# Altium PCB nodeMCU vs motor.PcbDoc
Units mil, origin at the board's own origin, x right, y up, seen from the top; angles counter-clockwise.
Board outline 3010.03 x 2385.03 mil, 2 copper layers (Top Layer, Bottom Layer); 4 components, 12 nets, 48 pads, 4 vias.
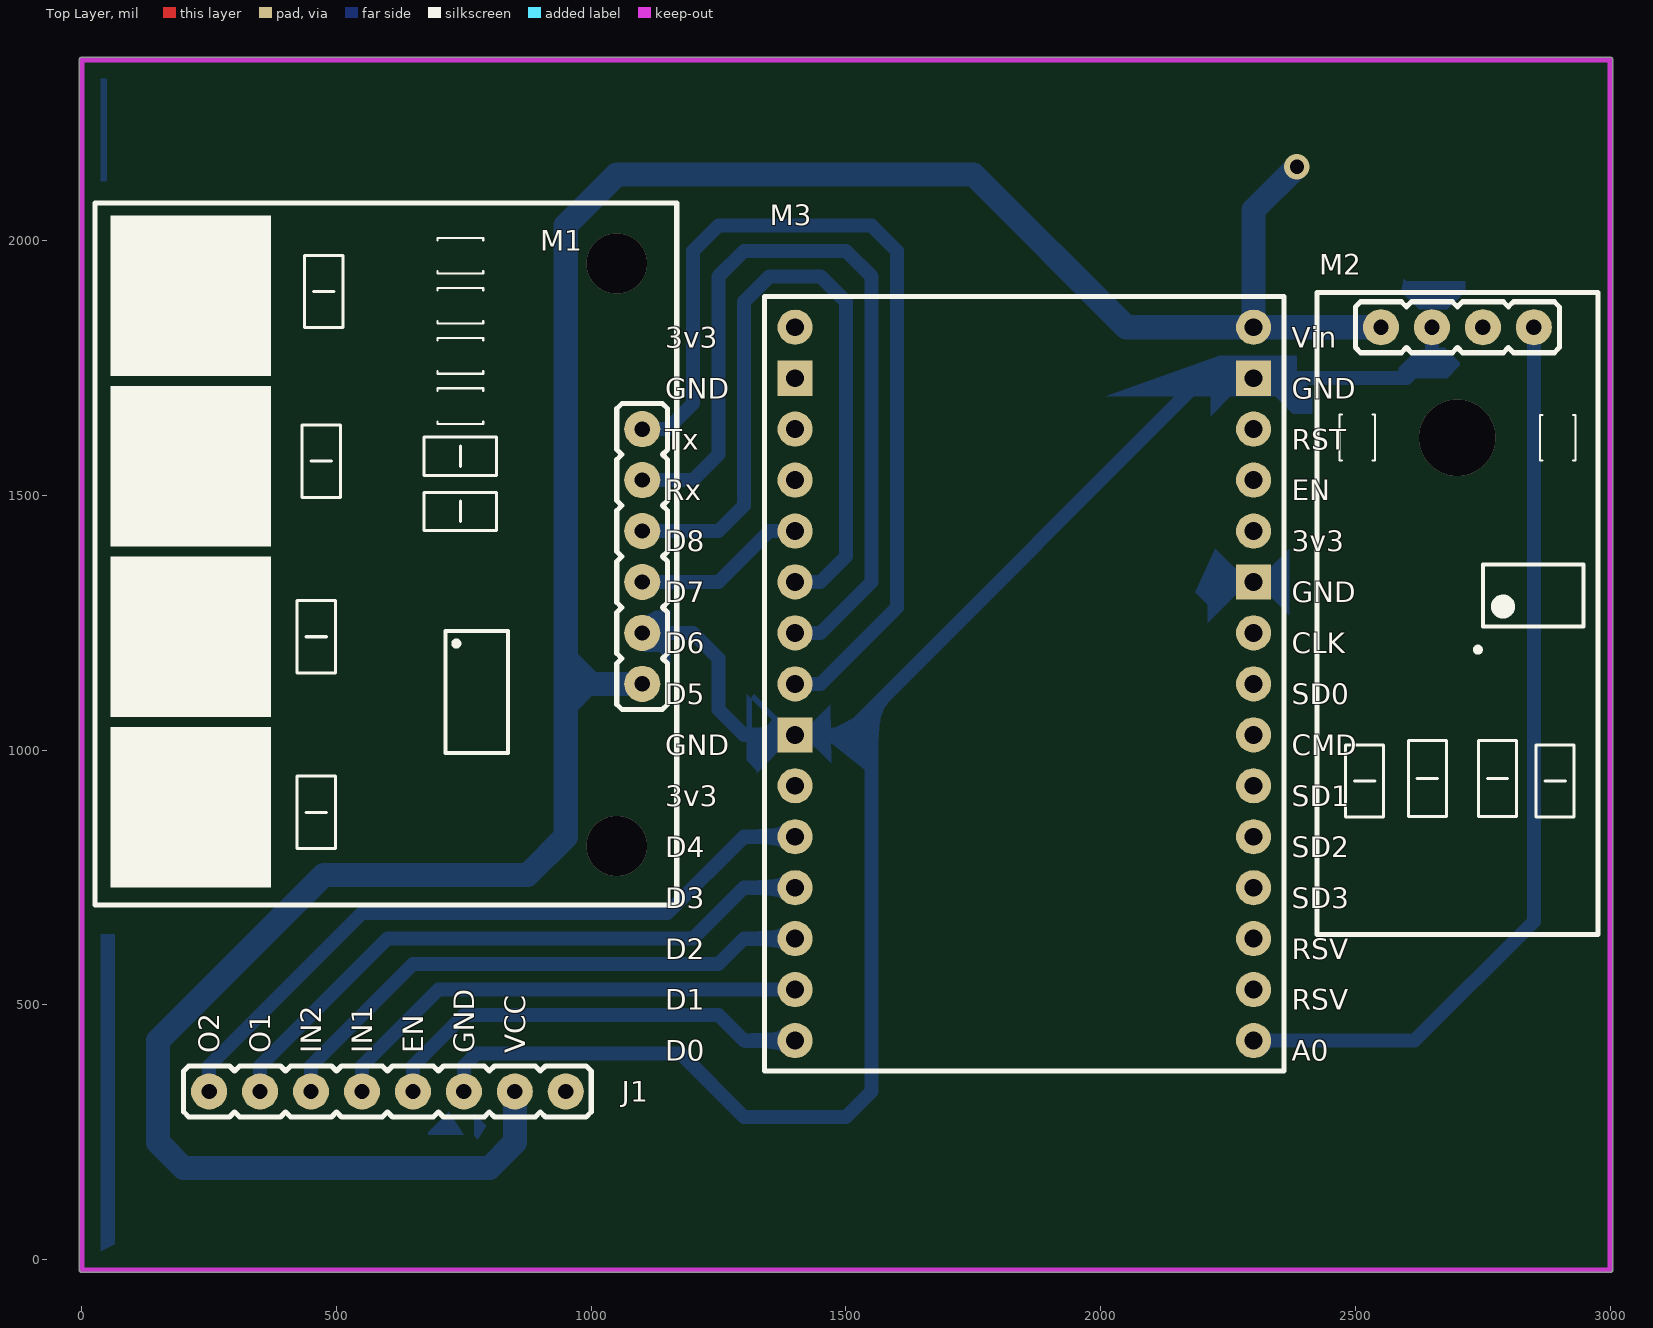
[diagram p0: Top Layer view]
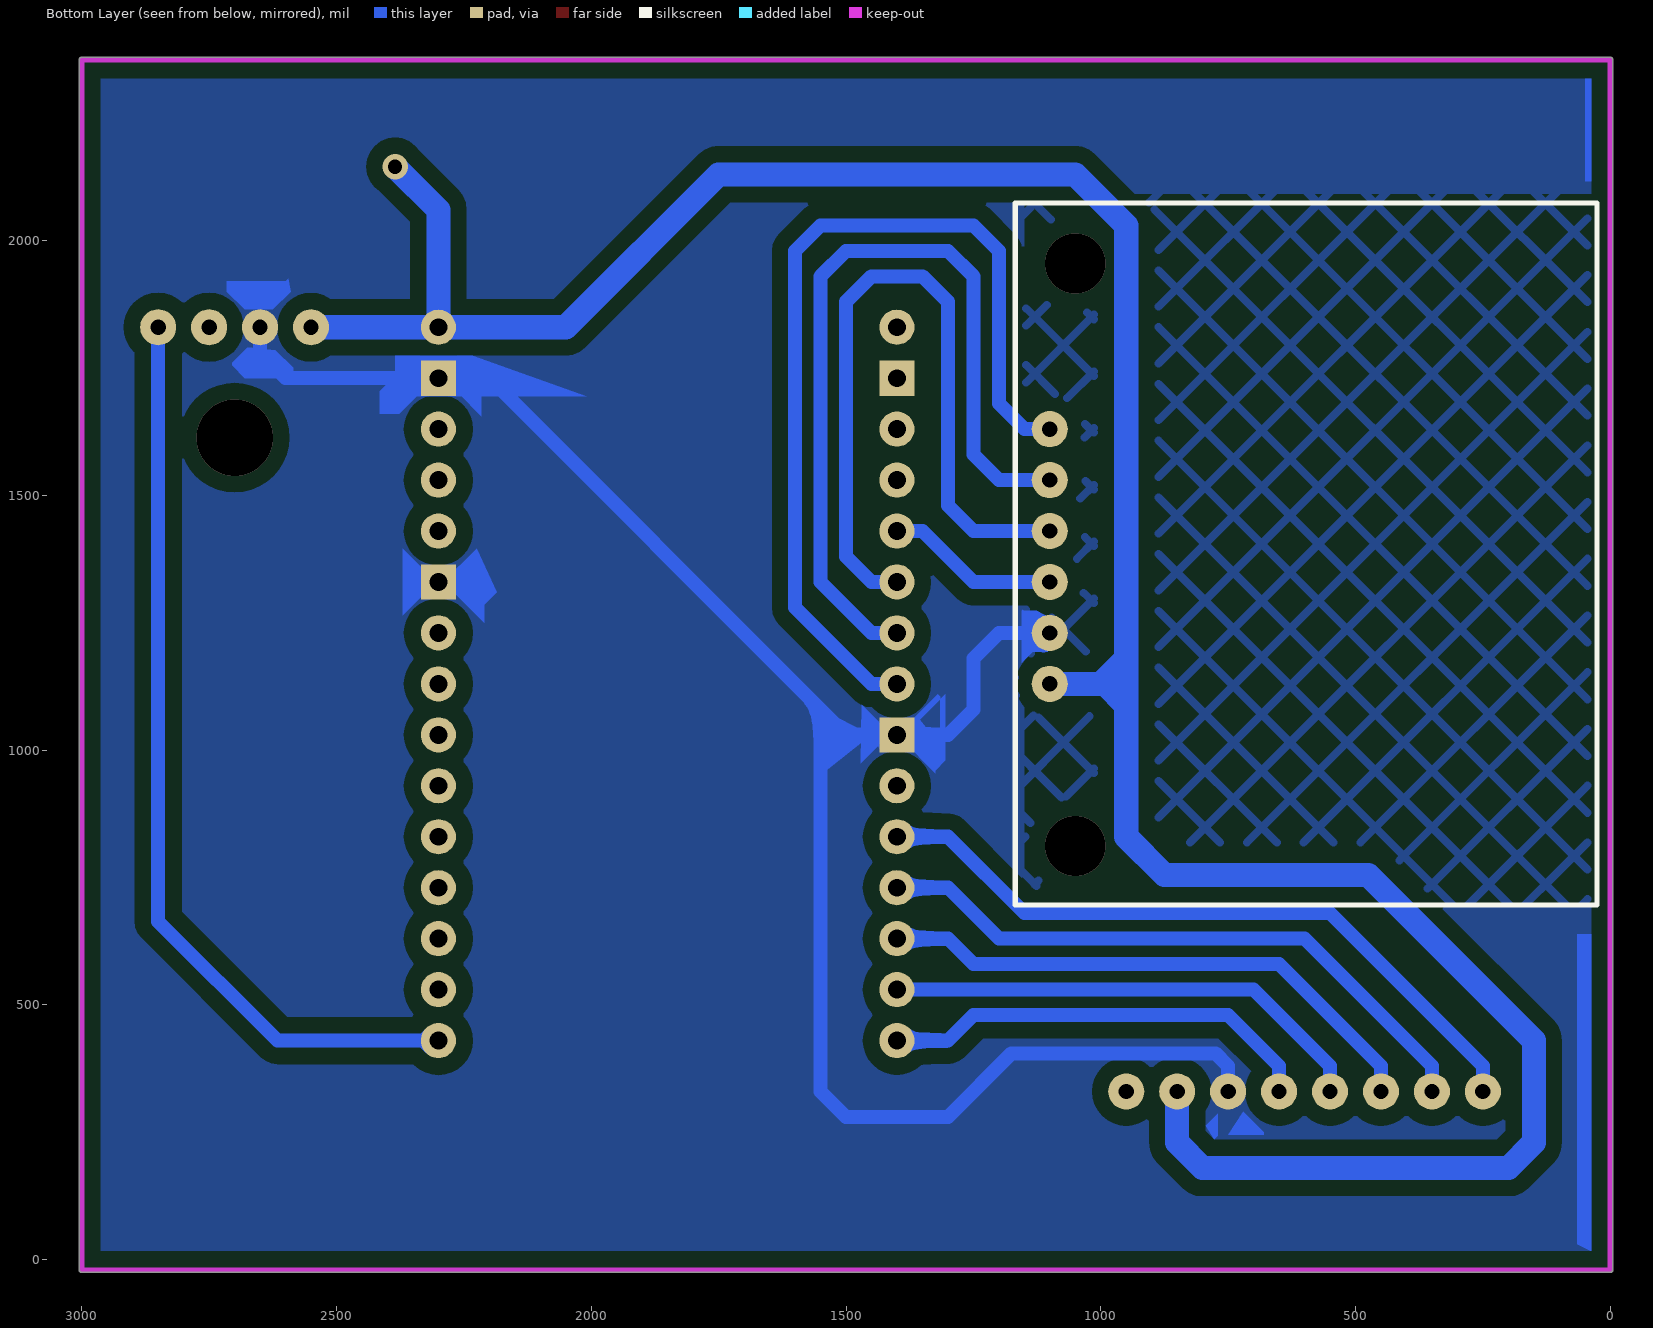
[diagram p1: Bottom Layer view, seen from below]

## Layer stack, top to bottom
Top Solder: solder mask 0.4, Solder Resist, Dk 3.5
Top Layer: signal copper 1.4
Dielectric 1: dielectric 12.6, FR-4, Dk 4.8
Bottom Layer: signal copper 1.4
Bottom Solder: solder mask 0.4, Solder Resist, Dk 3.5

## Board outline
0,-25.01 cw(c0,-20) -5.01,-20 -5.01,2355 cw(c0,2355) 0,2360.02 3000,2360.02 cw(c3000,2355) 3005.01,2355 3005.02,-20 cw(c3000,-20) 3000,-25.01

## Design rules (kind name [scope] priority, off if disabled: settings)
Clearance [All] p1: gap=32 ignorepadtopadclearanceinfootprint=FALSE except(0: Arc-Hole Track-Hole SMDPad-Hole THPad-Hole Via-Hole Fill-Hole Poly-Hole Region-Hole Text-Hole)
PlaneConnect [All] p1: planeconnectstyle=Direct reliefexpansion=20 reliefentries=4 reliefconductorwidth=10 reliefairgap=10
PolygonConnect [All] p1: connectstyle=Direct reliefconductorwidth=10 reliefentries=4 polygonreliefangle="90 Angle" airgapwidth=10
RoutingVias [All] p1: holewidth=28 width=50 viastyle="Through Hole" minholewidth=28 minwidth=50 maxholewidth=28 maxwidth=50
SolderMaskExpansion [All] p1: expansion=4
Width [All] p1: maxlimit=47.24 minlimit=10 preferedwidth=39.37 toplayer_maxwidth=10 toplayer_prefwidth=10 bottomlayer_minwidth=27.56 minimp=50.000000 maximp=50.000000 favimp=50.000000
29 further rules are at their usual default settings.

## Components (designator, comment, footprint, x,y, rotation, side; value= is the part's Value field where it differs from the comment)
J1 "JP_8" JP_8 250,330 r0 top locked
M1 "Module TTP224" MODULE_TTP224 1100,1380 r0 top locked
M2 "Module LDR" "MODULE LDR" 2700,1830 r90 top locked
M3 "NodeMCU" NODEMCU_V1.0_LABEL_OUTSIDE 1850,1130 r0 top

## Footprints (in the part's own frame and the unit in brackets; to place one, negate y for a bottom-side part, rotate by r counter-clockwise, add the part's x,y. Pads: shape width x height; smd on the part's side, far side on the other; paste and mask are expansions set on the pad)
JP_8 [mm]
  round 1.8 hole 0.762: 1(0,0) 2(2.54,0) 3(5.08,0) 4(7.62,0) 5(10.16,0) 6(12.7,0) 7(15.24,0) 8(17.78,0)
  silkscreen extent -1.27,-1.27 19.05,1.27, body extent -1.27,-1.27 19.05,1.27, height 8.54
"MODULE LDR" [mm]
  round 1.8 hole 0.762: 1(0,3.81) 2(0,1.27) 3(0,-1.27) 4(0,-3.81)
  silkscreen extent -30.28,-7 1.72,7, body extent -30.52,-6.96 1.75,7.06, height 35.06
MODULE_TTP224 [mm]
  round 1.8 hole 0.762: 1(0,6.35) 2(0,3.81) 3(0,1.27) 4(0,-1.27) 5(0,-3.81) 6(0,-6.35)
  silkscreen extent -27.28,-17.38 1.72,17.62, body extent -27.33,-17.44 1.63,17.59, height 6.81
NODEMCU_V1.0_LABEL_OUTSIDE [mil]
  round 69 hole 35: 1(-450,700) 3(-450,500) 4(-450,400) 5(-450,300) 6(-450,200) 7(-450,100) 8(-450,0) 10(-450,-200) 11(-450,-300) 12(-450,-400) 13(-450,-500) 14(-450,-600) 15(-450,-700) 16(450,-700) 17(450,-600) 18(450,-500) 19(450,-400) 20(450,-300) 21(450,-200) 22(450,-100) 23(450,0) 24(450,100) 26(450,300) 27(450,400) 28(450,500) 30(450,700)
  rect 69x69 hole 35: 2(-450,600) 9(-450,-100) 25(450,200) 29(450,600)
  silkscreen extent -510,-760 510,760, body extent -503,-956 503,982, height 306

## Part data
M3: library part NodeMCU-v1.0, "NodeMCU DevKit v1.0"

## Via types
v1: diameter 118.11, hole 118.11, Top Layer to Bottom Layer, 2 vias
v2: diameter 150, hole 150, Top Layer to Bottom Layer, 1 vias
v3: diameter 50, hole 28, Top Layer to Bottom Layer, tented bottom, 1 vias

## Nets (pads, with @x,y where several pads share a name; then routed paths per layer and width w, separated by ;. In a path a pad name is that pad's centre, name@x,y a point inside that pad or via, vN(x,y) a via of type N, cw(c..) or ccw(c..) an arc to the next point about the centre after c; other vN are vias at no path point)
EN: J1.5 M3.15 | length 862.1
  Bottom Layer w27.56: J1.5 650,380 750,480 1250,480 1300,430 M3.15
GND: J1.6 M1.5 M2.2 M3.29 | length 3734.9
  Bottom Layer w27.56: J1.6 750,380 775,405 1175,405 1300,280 1500,280 1550,330 1550,1080 ; M1.5 1200,1230 1250,1180 1250,1080 1300,1030 1400,1030 1500,1030 1550,1080 ; M2.2 2650,1780 2600,1730 M3.29 2200,1730 1550,1080
IN1: J1.4 M3.14 | length 962.1
  Bottom Layer w27.56: J1.4 550,380 700,530 M3.14
IN2: J1.3 M3.13 | length 1103.6
  Bottom Layer w27.56: J1.3 450,380 650,580 1250,580 1300,630 M3.13
NetM1_1: M1.1 M3.8 | length 1824.3
  Bottom Layer w27.56: M1.1 1150,1630 1200,1680 1200,1980 1250,2030 1550,2030 1600,1980 1600,1280 1450,1130 M3.8
NetM1_2: M1.2 M3.7 | length 1653.6
  Bottom Layer w27.56: M1.2 1200,1530 1250,1580 1250,1930 1300,1980 1500,1980 1550,1930 1550,1330 1450,1230 M3.7
NetM1_3: M1.3 M3.6 | length 1482.8
  Bottom Layer w27.56: M1.3 1250,1430 1300,1480 1300,1880 1350,1930 1450,1930 1500,1880 1500,1380 1450,1330 M3.6
NetM1_4: M1.4 M3.5 | length 341.4
  Bottom Layer w27.56: M1.4 1250,1330 1350,1430 M3.5
NetM2_4: M2.4 M3.16 | length 1812.9
  Bottom Layer w27.56: M3.16 2616,430 2850,664 M2.4
O1: J1.2 M3.12 | length 1245
  Bottom Layer w27.56: J1.2 350,380 600,630 1200,630 1300,730 M3.12
O2: J1.1 M3.11 | length 1386.4
  Bottom Layer w27.56: J1.1 250,380 550,680 1150,680 1300,830 M3.11
VCC: J1.7 M1.6 M2.1 M3.30 | length 5493.7
  Bottom Layer w47.24: J1.7 850,230 800,180 200,180 150,230 150,430 475,755 875,755 950,830 950,1180 ; M1.6 1000,1130 950,1180 ; v3(2385,2145) 2300,2060 M3.30 ; M2.1 M3.30 ; 950,1180 950,2030 1050,2130 1750,2130 2050,1830 M3.30
pads on no net: J1.8 M2.3 M3.1 M3.2 M3.3 M3.4 M3.9 M3.10 M3.17 M3.18 M3.19 M3.20 M3.21 M3.22 M3.23 M3.24 M3.25 M3.26 M3.27 M3.28
copper on no net:
  other v1: 1050,812 1050,1955
  other v2: 2700,1613.46

## Polygon pours and split planes (outlines as drawn)
GND on Bottom Layer "Bottom Layer-GND" (solid, pour order 0): 0,2355 0,2092.36 1150,2092.36 1150,692.36 0,692.36 0,-20 3000,-20 3000,2355
GND on Bottom Layer "Bottom Layer-GND 1" (hatched 45Degree grid 78.74 track 15.75, pour order 2): 0,2130 1200,2130 1200,630 0,630

## Keep-outs
Keep-Out Layer:
  lines w10: 0,-20 3000,-20 3000,2355 0,2355 0,-20

## Other copper
Bottom Layer:
  region net VCC: 950,1055 950,1130 975,1155 1000,1130 1025,1130
  region net GND: 1484.25,1016.15
  region net GND: 1550,1055 1525,1055 1500,1030
  region net GND: 1450,1030 1545.4,955 1550,955 1550,1080
  region net GND: 1100,1205 1104,1201 1104,1193 1133,1193 1155,1171 1155,1274 1153,1276 1150.31,1273.31 1125.31,1273.31 1100,1260.02
  region: 2322,457
  region net NetM2_4: 2326,452 2348,430 2349,430 2324,405 2313,416 2313,430
  region net GND: 39.32,17.32 37,17.32 37,639 65,639 65,30
  region net GND: 49,2317.84 37,2317.84 37,2116.16 49,2116.16
  region net GND: 720,290 680,250 680,245 750,245
  region net GND: 793.9,262.57 770,286.47 770,242.86 776.76,236.1
  region net GND: 1469.05,1089.29 1415,1035.24 1415,1015 1430,1015 1470.89,974.11
  region: 2225,1395 2290,1330 2210,1250 2210,1285 2185,1310
  region: 2370,1395 2335,1360 2335,1300 2370,1265
  region net GND: 2232.57,1773.9 2385,1773.9 2385,1695 2010,1695
  region net GND: 1355,1060 1305,1110 1305,980 1325,960 1325,955 1390,1020 1390,1040 1320,1110 1315,1105 1315,1022.08 1321,1016.08
  region net GND: 2260,1700 2215.75,1655.75 2215.75,1743.85
  region net GND: 2334.26,1702.44 2376.7,1660 2415,1660 2415,1704.5 2389.5,1730
  region net GND: 2620,1785 2585,1750 2585,1730 2680,1730 2705,1755 2705,1760 2675,1790 2665,1790
  region net GND: 2590,1900 2625,1865 2680,1865 2715,1900 2715,1920 2600,1920 2595,1925

## Silkscreen, mask and mechanical layers (free items; w line width, h text height)
Top Overlay:
  text "O2" at 270,405 h40 r90
  text "O1" at 370,405 h40 r90
  text "IN2" at 470,405 h40 r90
  text "IN1" at 570,405 h40 r90
  text "EN" at 670,405 h40 r90
  text "GND" at 770,405 h40 r90
  text "VCC" at 870,405 h40 r90
Bottom Solder:
  region: 950,1055 950,1130 975,1155 1000,1130 1025,1130
  lines w47.24: 850,330 850,230 800,180 200,180 150,230 150,430 475,755 875,755 950,830 950,1180 ; 1100,1130 1000,1130 950,1180 ; 2550,1830 2300,1830 2050,1830 1750,2130 1050,2130 950,2030 950,1180

## Text inside footprints (layer, text, board x,y; h text height)
M3: Top Overlay "D0" at 1145,390.01 h40; Top Overlay "D1" at 1145,490.01 h40; Top Overlay "D2" at 1145,590.01 h40; Top Overlay "D3" at 1145,690.01 h40; Top Overlay "D4" at 1145,790.01 h40; Top Overlay "3v3" at 1145,890.01 h40; Top Overlay "GND" at 1145,990.01 h40; Top Overlay "D5" at 1145,1090.01 h40; Top Overlay "D6" at 1145,1190.01 h40; Top Overlay "D7" at 1145,1290.01 h40; Top Overlay "D8" at 1145,1390.01 h40; Top Overlay "Rx" at 1145,1490.01 h40; Top Overlay "Tx" at 1145,1590.01 h40; Top Overlay "GND" at 1145,1690.01 h40; Top Overlay "3v3" at 1145,1790.01 h40; Top Overlay "Vin" at 2375,1790.01 h40; Top Overlay "GND" at 2375,1690.01 h40; Top Overlay "RST" at 2375,1590.01 h40; Top Overlay "EN" at 2375,1490.01 h40; Top Overlay "3v3" at 2375,1390.01 h40; Top Overlay "GND" at 2375,1290.01 h40; Top Overlay "CLK" at 2375,1190.01 h40; Top Overlay "SD0" at 2375,1090.01 h40; Top Overlay "CMD" at 2375,990.01 h40; Top Overlay "SD1" at 2375,890.01 h40; Top Overlay "SD2" at 2375,790.01 h40; Top Overlay "SD3" at 2375,690.01 h40; Top Overlay "RSV" at 2375,590.01 h40; Top Overlay "RSV" at 2375,490.01 h40; Top Overlay "A0" at 2375,390.01 h40